# Altium PCB DB_3.PcbDoc
Units mil, origin at the board's own origin, x right, y up, seen from the top; angles counter-clockwise.
Board outline 1675 x 1950 mil, 4 copper layers (Top Layer, Signal Layer 1, Ground, Bottom Layer), stack 30.634 mil thick; 75 components, 70 nets, 262 pads, 0 vias.
Unrouted connection lines stored in the file: 137.
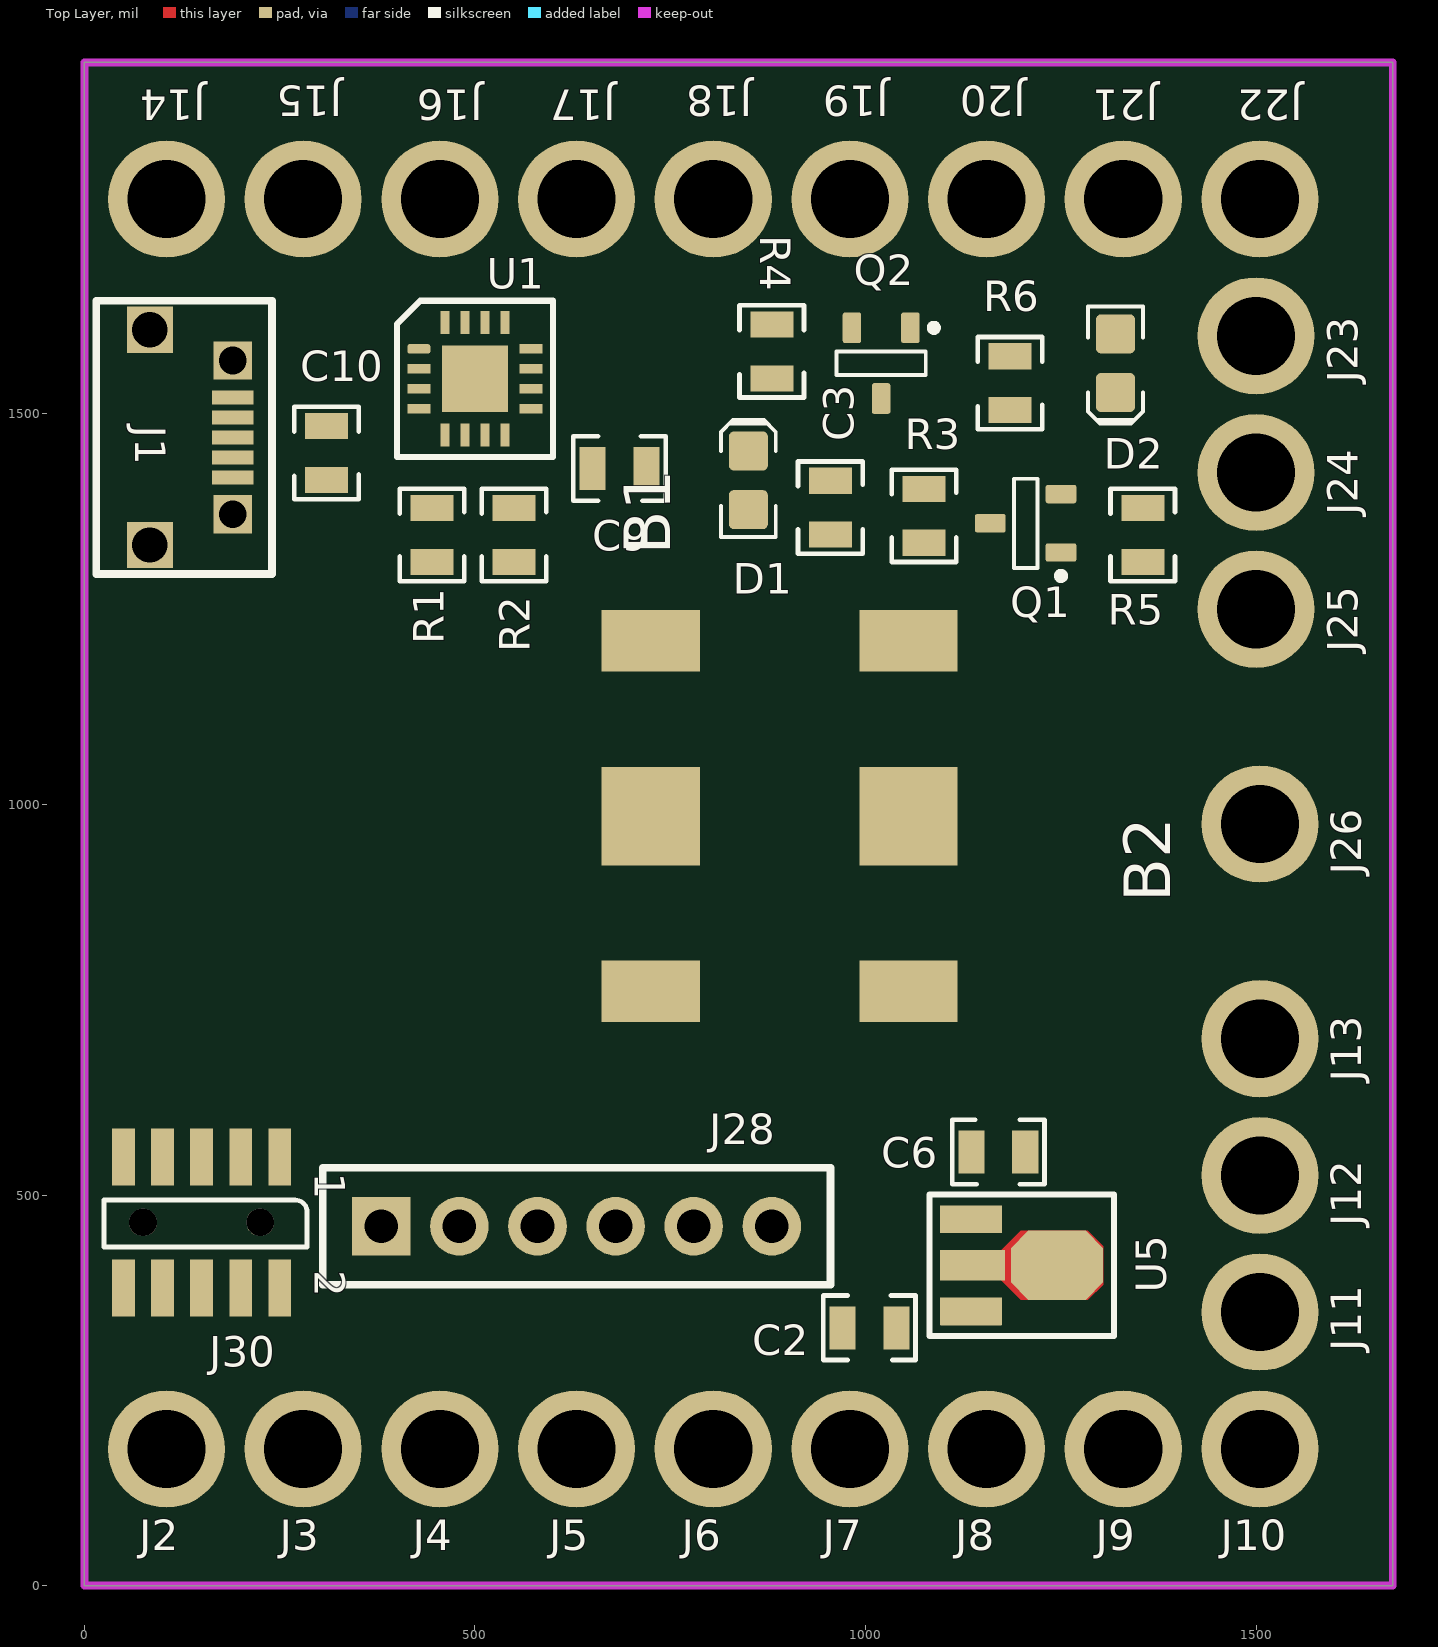
[diagram p0: Top Layer view]
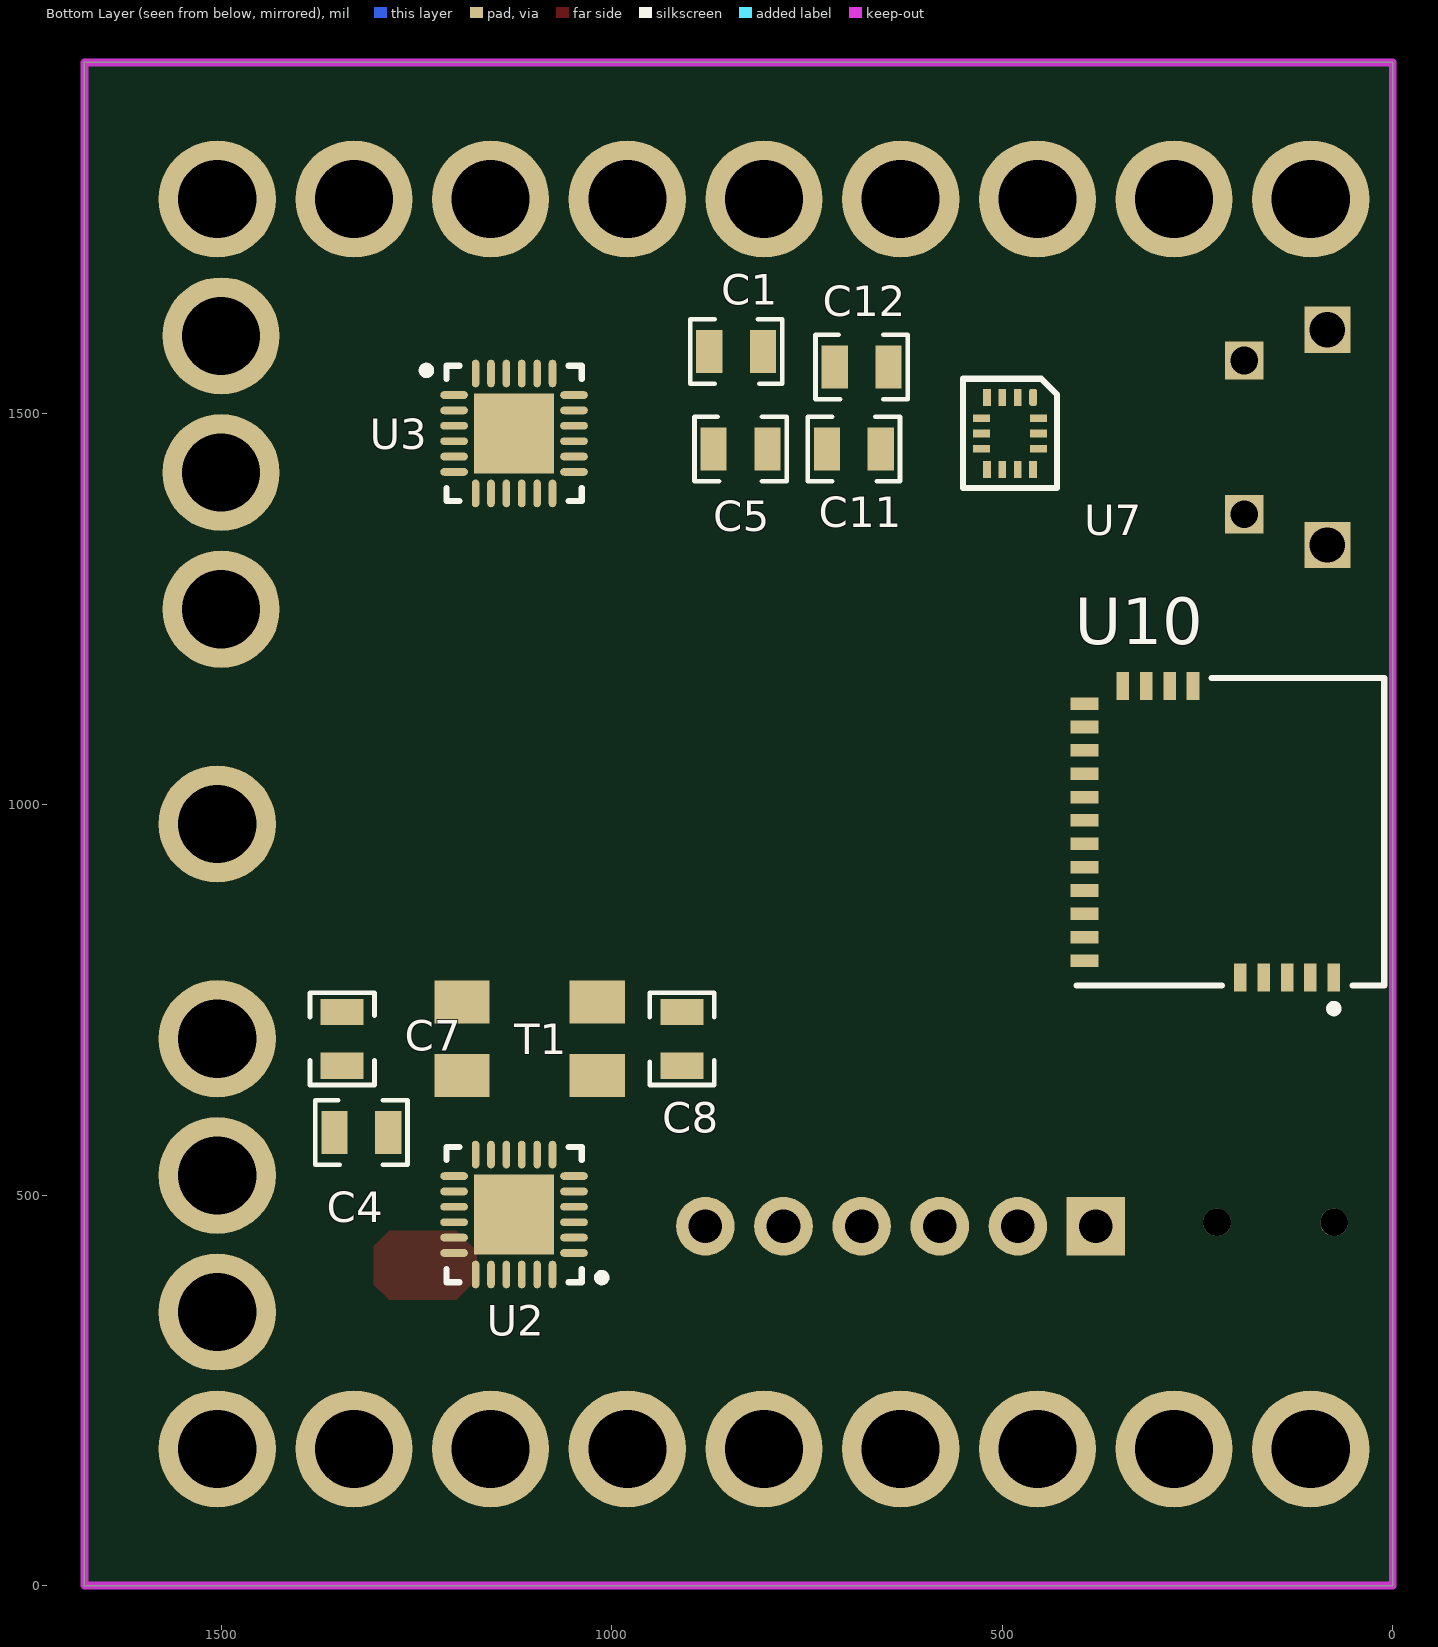
[diagram p1: Bottom Layer view, seen from below]
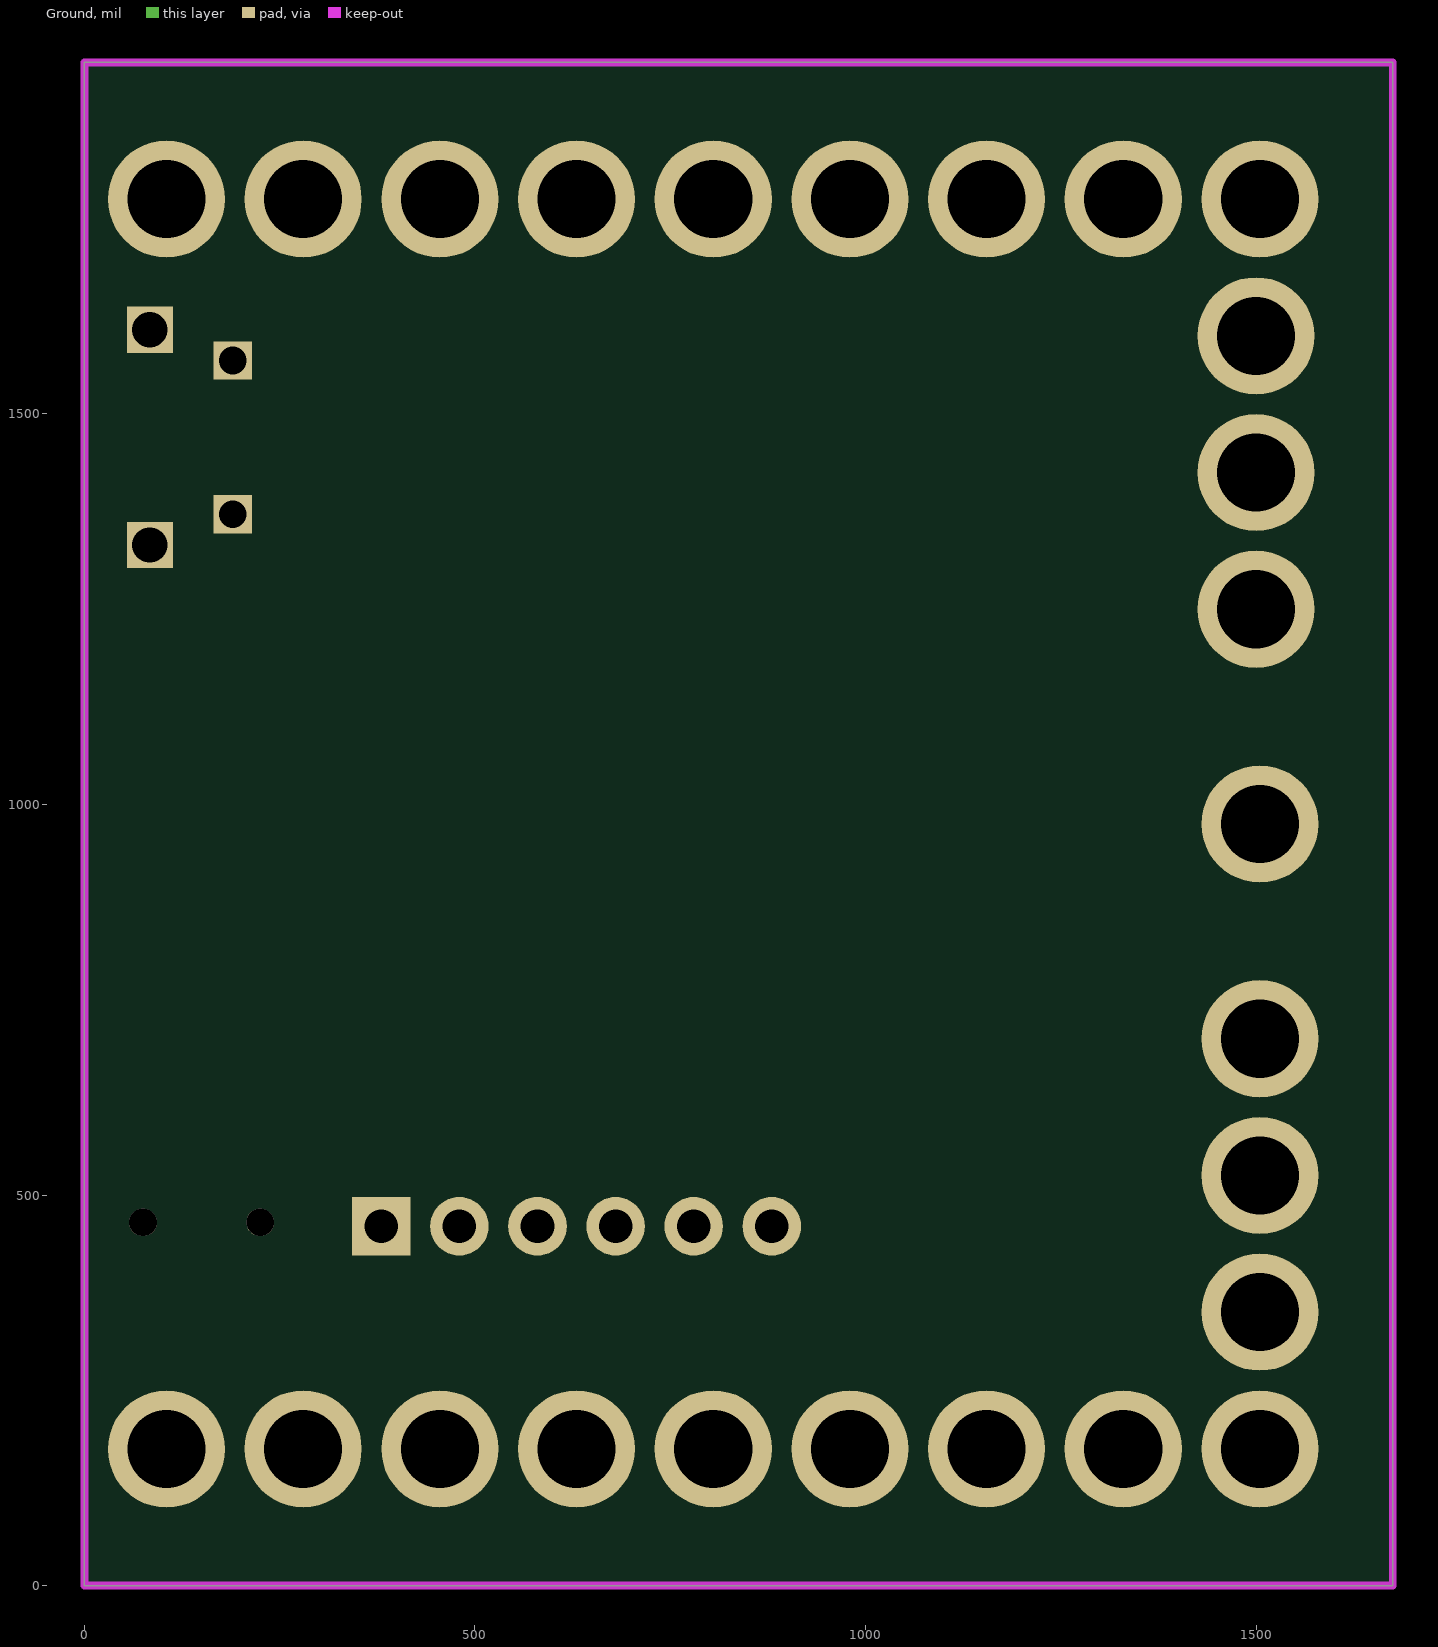
[diagram p2: Ground]

## Layer stack, top to bottom
Top Solder: solder mask 0.4, Solder Resist, Dk 3.5
Top Layer: signal copper 1.4
Dielectric 1: core 10, FR-4, Dk 4.2
Signal Layer 1: signal copper 1.417
Dielectric 3: prepreg 5, Dk 4.2
Ground: signal copper 1.417
Dielectric 2: core 10, Dk 4.2
Bottom Layer: signal copper 1.4
Bottom Solder: solder mask 0.4, Solder Resist, Dk 3.5

## Board outline
0,0 1675,0 1675,1950 0,1950

## Design rules (kind name [scope] priority, off if disabled: settings)
Clearance [All] p1: gap=6 ignorepadtopadclearanceinfootprint=FALSE except(0: Arc-Hole Track-Hole SMDPad-Hole THPad-Hole Via-Hole Fill-Hole Poly-Hole Region-Hole Text-Hole)
HoleSize [All] p1: absolutevalues=TRUE maxlimit=200 minlimit=1 maxpercent=80.000 minpercent=20.000
HoleToHoleClearance [All] p1: gap=6 allowstackedmicrovias=TRUE
MinimumSolderMaskSliver [All] p1: minsoldermaskwidth=6
PolygonConnect [All] p1: connectstyle=Relief reliefconductorwidth=10 reliefentries=4 polygonreliefangle="90 Angle" airgapwidth=10
RoutingVias [All] p1: holewidth=28 width=50 viastyle="Through Hole" minholewidth=8 minwidth=16 maxholewidth=28 maxwidth=50
SilkToSilkClearance [All] p1: silktosilkclearance=6
SilkToSolderMaskClearance [IsPad] p1: minsilkscreentomaskgap=6 clearancetoexposedcopper=TRUE
SolderMaskExpansion [All] p1: expansion=4
Width [All] p1: maxlimit=50 minlimit=6 preferedwidth=10
25 further rules are at their usual default settings.

## Classes and differential pairs
component class Sheet-3: C1 C3 C4 C5 C7 C8 C11 C12 D1 D2 J2 J3 J4 J5 J6 J7 J8 J9 J10 J11 J12 J13 J14 J15 J16 J17 J18 J19 J20 J21 J22 J23 J24 J25 J26 J28 J30 Q1 Q2 R3 R4 R5 R6 T1 U1 U2 U3 U7 U10
component class Battery_3: B1 B2 C2 C6 C9 C10 C16 C17 D3 H1 J1 R1 R2 R9 R10 R12 R13 R14 R15 R16 R17 R18 R19 U5 U8 U9

## Components (designator, comment, footprint, x,y, rotation, side; value= is the part's Value field where it differs from the comment)
B1 "XR48" XR48 1055,985 r270 top
B2 "XR48" XR48 725,985 r90 top
C1 "0.1µF" CAP-0805(2012)-R 840.55,1580 r180 bottom
C2 "0.33µF" CAP-0805(2012)-R 1005,330 r0 top
C3 "10000pF" CAP-0805(2012)-R 955,1380 r90 top
C4 "0.1µF" CAP-0805(2012)-R 1320.55,580 r0 bottom
C5 "10000pF" CAP-0805(2012)-R 835,1455 r0 bottom
C6 "0.1µF" CAP-0805(2012)-R 1170,555 r180 top
C7 "18pF" CAP-0805(2012)-R 1345,700 r90 bottom
C8 "18pF" CAP-0805(2012)-R 910,700 r270 bottom
C9 "47pF" CAP-0805(2012)-R 685,1430 r0 top
C10 "47pF" CAP-0805(2012)-R 310,1450 r270 top
C11 "0.1µF" CAP-0805(2012)-R 690,1455 r180 bottom
C12 "10000pF" CAP-0805(2012)-R 680,1560 r0 bottom
C16 "10uF" CAP-0805(2012)-R 2230,245 r0 top
C17 "4.7uF" CAP-0805(2012)-R 2010,245 r0 top
D1 "YELLOW" LED-0805-A 850,1415 r90 top
D2 "YELLOW" LED-0805-A 1320,1565 r270 top
D3 "Red" LED-0805-A 4255,245 r0 top
H1 "H-0805(2012)" H-0805(2012)-H 2450,245 r0 top
J1 "USB" USB_CONNECTOR_5P_MICRO_USB_FCI 190,1470 r270 top
J2 "Conductive Thread" THREAD_HOLE 105,174.61 r180 top
J3 "Conductive Thread" THREAD_HOLE 280,175 r180 top
J4 "Conductive Thread" THREAD_HOLE 455,175 r180 top
J5 "Conductive Thread" THREAD_HOLE 630,175 r180 top
J6 "Conductive Thread" THREAD_HOLE 805,175 r180 top
J7 "Conductive Thread" THREAD_HOLE 980,175 r180 top
J8 "Conductive Thread" THREAD_HOLE 1155,175 r180 top
J9 "Conductive Thread" THREAD_HOLE 1330,175 r180 top
J10 "Conductive Thread" THREAD_HOLE 1505,175 r180 top
J11 "Conductive Thread" THREAD_HOLE 1505,350 r180 top
J12 "Conductive Thread" THREAD_HOLE 1505,525 r180 top
J13 "Conductive Thread" THREAD_HOLE 1505,700 r270 top
J14 "Conductive Thread" THREAD_HOLE 105,1775 r0 top
J15 "Conductive Thread" THREAD_HOLE 280,1775 r180 top
J16 "Conductive Thread" THREAD_HOLE 455,1775 r0 top
J17 "Conductive Thread" THREAD_HOLE 630,1775 r180 top
J18 "Conductive Thread" THREAD_HOLE 805,1775 r180 top
J19 "Conductive Thread" THREAD_HOLE 980,1775 r180 top
J20 "Conductive Thread" THREAD_HOLE 1155,1775 r180 top
J21 "Conductive Thread" THREAD_HOLE 1330,1775 r180 top
J22 "Conductive Thread" THREAD_HOLE 1505,1775 r180 top
J23 "Conductive Thread" THREAD_HOLE 1500,1600 r90 top
J24 "Conductive Thread" THREAD_HOLE 1500,1425 r90 top
J25 "Conductive Thread" THREAD_HOLE 1500,1250 r90 top
J26 "Conductive Thread" THREAD_HOLE 1505,975 r180 top
J28 "Header 6 pin" HEADER-6-100MIL 380,460 r0 top
J30 "GRPB052VWQP-RC" GRPB052VWQP-RC 50,548.5 r270 top
Q1 "Value" SOT23-3 1205,1360 r0 top
Q2 "Value" SOT23-3 1020,1565 r90 top
R1 "27" R-0805(2012)-R 445,1345 r90 top
R2 "27" R-0805(2012)-R 550,1345 r90 top
R3 "30" R-0805(2012)-R 1075,1369.45 r90 top
R4 "30" R-0805(2012)-R 880,1580 r270 top
R5 "1k" R-0805(2012)-R 1355,1345 r90 top
R6 "1k" R-0805(2012)-R 1185,1539.45 r270 top
R9 "976KR" R-0805(2012)-R 2625,245 r0 top
R10 "562KR" R-0805(2012)-R 1790,245 r0 top
R12 "Resistance" R-0805(2012)-R 3210,245 r0 top
R13 "560k" R-0805(2012)-R 4670,245 r0 top
R14 "Resistance" R-0805(2012)-R 4890,245 r0 top
R15 "560k" R-0805(2012)-R 3430,245 r0 top
R16 "Resistance" R-0805(2012)-R 2990,245 r0 top
R17 "Resistance" R-0805(2012)-R 3650,245 r0 top
R18 "Resistance" R-0805(2012)-R 5110,245 r0 top
R19 "Resistance" R-0805(2012)-R 4450,245 r0 top
T1 "8MHz" CRYSTAL-8MHZ 1105,700 r180 bottom
U1 "FT230XQ-R" QFN-16 500,1545 r0 top
U2 "ADI-AD7147" LFCSP_WQ 1125,475 r0 bottom
U3 "ADI-AD7147" LFCSP_WQ 1125,1475 r180 bottom
U5 "L78L33ACUTR" SOT89-3 1200,410 r0 top
U7 "LSM6DS3H" LGA-14 490,1475 r270 bottom
U8 "MCP1640BT-I/CHY" MCHP-SOT-23-CHY6_L 2805,205 r0 top
U9 "BQ2002DSN" D0008A_M 3940,170 r0 top
U10 "CYBLE-022001-00" CYP-SP21_V 235,965 r270 bottom

## Footprints (in the part's own frame and the unit in brackets; to place one, negate y for a bottom-side part, rotate by r counter-clockwise, add the part's x,y. Pads: shape width x height; smd on the part's side, far side on the other; paste and mask are expansions set on the pad)
CAP-0805(2012)-R [mm] "Capacitor 0805(2012) Reflow"
  rect 0.85x1.4 smd: 1(-0.875,0) 2(0.875,0)
  silkscreen extent -1.5,-1.05 1.5,1.05, body extent -1,-0.63 1,0.63, height 0.78
CRYSTAL-8MHZ [mm] "ABRACON ABMM2-8.000MHZ-E2-T"
  rect 1.8x1.4 smd: 1(-2.2,-1.2) 2(-2.2,1.2) 2(2.2,-1.2) 3(2.2,1.2)
  body extent -3,-1.78 3,1.82, height 1.21
CYP-SP21_V [mm] "Module, 2-Leads, Body 10x10mm"
  rect 0.91x0.41 smd: 1(4.745,4.053) 2(4.745,3.293) 3(4.745,2.533) 4(4.745,1.773) 5(4.745,1.013) 18(-4.745,-2.808) 19(-4.745,-2.047) 20(-4.745,-1.288) 21(-4.745,-0.527)
  rect 0.41x0.91 smd: 6(4.19,-4.052) 7(3.43,-4.052) 8(2.67,-4.052) 9(1.91,-4.052) 10(1.15,-4.052) 11(0.39,-4.052) 12(-0.37,-4.052) 13(-1.13,-4.052) 14(-1.89,-4.052) 15(-2.65,-4.052) 16(-3.41,-4.052) 17(-4.17,-4.052)
  silkscreen extent -5,-4.31 5.87,5.69, body extent -5,-4.31 5,5.69, height 1.8
D0008A_M [mm] "SOIC, 8-Leads, Body 5x4mm, Pitch 1.27mm, IPC Low Density"
  rrect15% 1.65x0.65 smd: 1(-2.825,1.905) 2(-2.825,0.635) 3(-2.825,-0.635) 4(-2.825,-1.905) 5(2.825,-1.905) 6(2.825,-0.635) 7(2.825,0.635) 8(2.825,1.905)
  silkscreen extent -2.95,-2.5 1.6,2.9, body extent -3,-2.45 3,2.45, height 1.63
GRPB052VWQP-RC [mm] "CONN HEADER .050\" 10PS DL SMD AU"
  rect 1.85x0.74 smd: 1(0,5.08) 2(4.25,5.08) 3(0,3.81) 4(4.25,3.81) 5(0,2.54) 6(4.25,2.54) 7(0,1.27) 8(4.25,1.27) 9(0,0) 10(4.25,0)
  round 0.9 hole 0.9 unplated: 21(2.121,0.635) 22(2.121,4.445)
  silkscreen extent 1.4,-0.63 2.92,5.97, body extent -0.62,-0.63 4.88,5.72, height 4.1
H-0805(2012)-H [mm] "Inductor 0805(2012) Reflow"
  rect 0.85x1.4 smd: 1(-0.875,0) 2(0.875,0)
  silkscreen extent -1.5,-1.05 1.5,1.05, body extent -1,-0.62 1,0.63, height 0.5
HEADER-6-100MIL [mil] "100 mil spacing"
  rect 75x75 hole 43: 1(0,0)
  round 75 hole 43: 2(100,0) 3(200,0) 4(300,0) 5(400,0) 6(500,0)
  silkscreen extent -75,-75 575,75, body extent -50,-50 550,50, height 339
LED-0805-A [mil]
  round 20 on Mech14: 0(0,0)
  rrect25% 50x50 smd: A(-37.5,0) K(37.5,0)
  Top Layer pour cut-out: -15,30 15,30 15,-30 -15,-30
  silkscreen extent -72,-35 77,35, body extent -39,-25 39,25, height 31
LFCSP_WQ [mm] "QFN, 24-Leads, Body 4x4mm, Pitch 0.5mm, Thermal Pad 2.5x2.5mm, IPC Medium Density"
  oval 0.9x0.25 smd: 1(-1.95,1.25) 2(-1.95,0.75) 3(-1.95,0.25) 4(-1.95,-0.25) 5(-1.95,-0.75) 6(-1.95,-1.25) 13(1.95,-1.25) 14(1.95,-0.75) 15(1.95,-0.25) 16(1.95,0.25) 17(1.95,0.75) 18(1.95,1.25)
  oval 0.25x0.9 smd: 7(-1.25,-1.95) 8(-0.75,-1.95) 9(-0.25,-1.95) 10(0.25,-1.95) 11(0.75,-1.95) 12(1.25,-1.95) 19(1.25,1.95) 20(0.75,1.95) 21(0.25,1.95) 22(-0.25,1.95) 23(-0.75,1.95) 24(-1.25,1.95)
  rect 2.6x2.6 smd: 25(0,0)
  silkscreen extent -2.97,-2.2 2.2,2.2, body extent -2.05,-2.05 2.05,2.05, height 1
LGA-14 [mm] "LGA-14 2.5X3X0.86 14L"
  rrect50% 0.55x0.25 smd: 1(-1.175,0.75)
  rect 0.55x0.25 smd: 2(-1.175,0.25) 3(-1.175,-0.25) 4(-1.175,-0.75) 8(1.175,-0.75) 9(1.175,-0.25) 10(1.175,0.25) 11(1.175,0.75)
  rect 0.25x0.55 smd: 5(-0.5,-0.925) 6(0,-0.925) 7(0.5,-0.925) 12(0.5,0.925) 13(0,0.925) 14(-0.5,0.925)
  silkscreen extent -1.78,-1.52 1.78,1.52, body extent -1.52,-1.27 1.48,1.23, height 0.86
MCHP-SOT-23-CHY6_L [mm] "SOT23, 6-Leads, Body 2.9x1.55mm, Pitch 0.95mm, IPC High Density"
  rect 0.9x0.6 smd: 1(-1.2,0.95) 2(-1.2,0) 3(-1.2,-0.95) 4(1.2,-0.95) 5(1.2,0) 6(1.2,0.95)
  silkscreen extent -1.32,-1.55 0.35,1.92, body extent -0.9,-1.55 0.9,1.55, height 1.45
QFN-16 [mm]
  rrect50% 0.75x0.3 smd: 1(-1.825,0.975)
  rect 0.75x0.3 smd: 2(-1.825,0.325) 3(-1.825,-0.325) 4(-1.825,-0.975) 9(1.825,-0.975) 10(1.825,-0.325) 11(1.825,0.325) 12(1.825,0.975)
  rect 0.3x0.75 smd: 5(-0.975,-1.825) 6(-0.325,-1.825) 7(0.325,-1.825) 8(0.975,-1.825) 13(0.975,1.825) 14(0.325,1.825) 15(-0.325,1.825) 16(-0.975,1.825)
  rect 2.15x2.15 smd: 17(0,0)
  silkscreen extent -2.54,-2.54 2.54,2.54, body extent -2,-2 2,2, height 0.92
R-0805(2012)-R [mm] "Resistor 0805(2012) Reflow"
  rect 0.85x1.4 smd: 1(-0.875,0) 2(0.875,0)
  silkscreen extent -1.5,-1.05 1.5,1.05, body extent -1,-0.62 1,0.63, height 0.5
SOT23-3 [mm] "SOT23, 3 pin"
  round 0.5 on Mech14: 0(0,0)
  rrect25% 1x0.6 smd: 1(1.15,-0.95) 2(-1.15,0) 3(1.15,0.95)
  silkscreen extent -0.38,-1.81 1.25,1.45, body extent -1.4,-1.45 1.4,1.45, height 1.29
SOT89-3 [mm] "JEDEC TO-243 option AA / SOT89"
  round 1 on Mech14: 0(0,0)
  rrect1% 2x0.9 smd: 1(-1.65,1.5) 3(-1.65,-1.5)
  rrect1% 2.1x1 smd: 2(-1.6,0)
  oct 3x2.25 smd: 2(1.15,0)
  Top Layer region: -0.7,-0.45 -0.025,-1.125 2.15,-1.125 2.65,-0.625 2.65,0.625 2.15,1.125 -0.025,1.125 -0.7,0.45
  silkscreen extent -3,-2.3 3,2.3, body extent -2.25,-2.35 2.2,2.35, height 1.69
THREAD_HOLE [mil] "MAGNETIC_THREAD_HOLE"
  round 150 hole 100: 1(0,0)
USB_CONNECTOR_5P_MICRO_USB_FCI [mm] "USB_Connector_5P_MICRO_USB_FCI_TypeB"
  rect 0.45x1.35 smd: 1(-1.3,0) 2(-0.65,0) 3(0,0) 4(0.65,0) 5(1.3,0)
  rect 1.25x1.25 hole 0.9: 15(2.5,0) 16(-2.5,0)
  rect 1.5x1.5 hole 1.15: 18(-3.5,-2.7) 18(3.5,-2.7)
  silkscreen extent -4.44,-4.45 4.45,1.27, body extent -4.02,-5.33 4.02,0.25, height 2.73
XR48 [mm] "Size 13 Coin Cell Battery"
  rect 3.2x3.2 smd: 1(0,0)
  rect 2x3.2 smd: 2(-5.7,0) 2(5.7,0)
  body extent -6.68,-3.95 6.68,4.19, height 5.75

## Part data
C1 C4 C6 C11: library part C-0805(2012), "___ OHM ___ mW 0805(2012) SMD", Manufacturer=Yageo, Manufacturer Part Number=CC0805KRX7R9BB104, Operating Temperature="-55°C ~ 125°C", Package / Case="0805 (2012 Metric)", Ratings=-, Supplier Part Number 1=311-1140-1-ND, Temperature Coefficient=X7R, Tolerance=±10%, Voltage - Rated=50V, Applications="General Purpose", Capacitance=0.1µF, Category=Capacitors, Failure Rate=-, Features=-, Height - Seated (Max)=-, Lead Spacing=-, Lead Style=-, Mounting Type="Surface Mount, MLCC", Packaging="Cut Tape (CT)", Part Status=Active, RoHS="RoHS Compliant", Size / Dimension="0.079\" L x 0.049\" W (2.00mm x 1.25mm)", Supplier 1=Digi-Key, Thickness (Max)="0.033\" (0.85mm)"
  C1 C4: ComponentLink1Description=http://www.yageo.com/documents/recent/UPY-GPHC_X7R_6.3V-to-50V_16.pdf, ComponentLink1URL=http://www.yageo.com/documents/recent/UPY-GPHC_X7R_6.3V-to-50V_16.pdf, Pricing 1="1=0.1, 10=0.052, 25=0.0376, 50=0.0282, 100=0.023, 250=0.01928, 500=0.01646, 1000=0.01294 (USD)", Stock 1=1673347
  C6: ComponentLink1Description=http://www.yageo.com/documents/recent/UPY-GPHC_X7R_6.3V-to-50V_16.pdf, ComponentLink1URL=http://www.yageo.com/documents/recent/UPY-GPHC_X7R_6.3V-to-50V_16.pdf, Pricing 1="1=0.1, 10=0.052, 25=0.0376, 50=0.0282, 100=0.023, 250=0.01928, 500=0.01646, 1000=0.01294 (USD)", Stock 1=1673292
  C11: ComponentLink1Description=http://www.yageo.com/documents/recent/UPY-GPHC_X7R_6.3V-to-50V_17.pdf, ComponentLink1URL=http://www.yageo.com/documents/recent/UPY-GPHC_X7R_6.3V-to-50V_17.pdf, Pricing 1="1=0.1, 10=0.053, 25=0.0388, 50=0.029, 100=0.0237, 250=0.0198, 500=0.0169, 1000=0.01328 (USD)", Stock 1=1402266
C2: library part C-0805(2012), "___ OHM ___ mW 0805(2012) SMD", Manufacturer=Yageo, Manufacturer Part Number=CC0805KKX7R7BB334, Operating Temperature="-55°C ~ 125°C", Package / Case="0805 (2012 Metric)", Ratings=-, Supplier Part Number 1=311-1882-1-ND, Temperature Coefficient=X7R, Tolerance=±10%, Voltage - Rated=16V, Applications="General Purpose", Capacitance=0.33µF, Category=Capacitors, ComponentLink1Description=http://www.yageo.com/documents/recent/UPY-GPHC_X7R_6.3V-to-50V_16.pdf, ComponentLink1URL=http://www.yageo.com/documents/recent/UPY-GPHC_X7R_6.3V-to-50V_16.pdf, Failure Rate=-, Features=-, Height - Seated (Max)=-, Lead Spacing=-, Lead Style=-, Mounting Type="Surface Mount, MLCC", Packaging="Cut Tape (CT)", Part Status=Active, Pricing 1="1=0.19, 10=0.129, 25=0.0948, 50=0.0776, 100=0.0655, 250=0.05344, 500=0.04482, 1000=0.03965 (USD)", RoHS="RoHS Compliant", Size / Dimension="0.079\" L x 0.049\" W (2.00mm x 1.25mm)", Stock 1=5738, Supplier 1=Digi-Key, Thickness (Max)="0.057\" (1.45mm)"
C3 C5 C12: library part C-0805(2012), "___ OHM ___ mW 0805(2012) SMD", Manufacturer=Yageo, Manufacturer Part Number=CC0805KRX7R9BB103, Operating Temperature="-55°C ~ 125°C", Package / Case="0805 (2012 Metric)", Ratings=-, Supplier Part Number 1=311-1136-1-ND, Temperature Coefficient=X7R, Tolerance=±10%, Voltage - Rated=50V, Applications="General Purpose", Capacitance=10000pF, Category=Capacitors, Failure Rate=-, Features=-, Height - Seated (Max)=-, Lead Spacing=-, Lead Style=-, Mounting Type="Surface Mount, MLCC", Packaging="Cut Tape (CT)", Part Status=Active, RoHS="RoHS Compliant", Size / Dimension="0.079\" L x 0.049\" W (2.00mm x 1.25mm)", Supplier 1=Digi-Key, Thickness (Max)="0.024\" (0.60mm)"
  C3 C5: ComponentLink1Description=http://www.yageo.com/documents/recent/UPY-GPHC_X7R_6.3V-to-50V_16.pdf, ComponentLink1URL=http://www.yageo.com/documents/recent/UPY-GPHC_X7R_6.3V-to-50V_16.pdf, Pricing 1="1=0.1, 10=0.032, 25=0.0232, 50=0.0174, 100=0.0141, 250=0.01184, 500=0.0101, 1000=0.00794 (USD)", Stock 1=786089
  C12: ComponentLink1Description=http://www.yageo.com/documents/recent/UPY-GPHC_X7R_6.3V-to-50V_17.pdf, ComponentLink1URL=http://www.yageo.com/documents/recent/UPY-GPHC_X7R_6.3V-to-50V_17.pdf, Pricing 1="1=0.1, 10=0.033, 25=0.0236, 50=0.0178, 100=0.0145, 250=0.01216, 500=0.01036, 1000=0.00814 (USD)", Stock 1=501331
C7 C8: library part C-0805(2012), "___ OHM ___ mW 0805(2012) SMD", Manufacturer=Yageo, Manufacturer Part Number=CC0805JRNPO9BN180, Operating Temperature="-55°C ~ 125°C", Package / Case="0805 (2012 Metric)", Ratings=-, Supplier Part Number 1=311-1102-1-ND, Temperature Coefficient="C0G, NP0", Tolerance=±5%, Voltage - Rated=50V, Applications="General Purpose", Capacitance=18pF, Category=Capacitors, ComponentLink1Description=http://www.yageo.com/NewPortal/yageodocoutput?fileName=/pdf/MLCC/UPY-GP_NP0_16V-to-50V_14.pdf, ComponentLink1URL=http://www.yageo.com/NewPortal/yageodocoutput?fileName=/pdf/MLCC/UPY-GP_NP0_16V-to-50V_14.pdf, Failure Rate=-, Features=-, Height - Seated (Max)=-, Lead Spacing=-, Lead Style=-, Mounting Type="Surface Mount, MLCC", Packaging="Cut Tape (CT)", Part Status=Active, Pricing 1="1=0.1, 10=0.055, 25=0.0396, 50=0.0298, 100=0.0243, 250=0.02032, 500=0.01734, 1000=0.01363 (USD)", RoHS="RoHS Compliant", Size / Dimension="0.079\" L x 0.049\" W (2.00mm x 1.25mm)", Stock 1=101710, Supplier 1=Digi-Key, Thickness (Max)="0.024\" (0.60mm)"
C9 C10: library part C-0805(2012), "___ OHM ___ mW 0805(2012) SMD", Manufacturer=Yageo, Manufacturer Part Number=CC0805JRNPO9BN470, Operating Temperature="-55°C ~ 125°C", Package / Case="0805 (2012 Metric)", Ratings=-, Supplier Part Number 1=311-1107-1-ND, Temperature Coefficient="C0G, NP0", Tolerance=±5%, Voltage - Rated=50V, Applications="General Purpose", Capacitance=47pF, Category=Capacitors, ComponentLink1Description=http://www.yageo.com/NewPortal/yageodocoutput?fileName=/pdf/MLCC/UPY-GP_NP0_16V-to-50V_14.pdf, ComponentLink1URL=http://www.yageo.com/NewPortal/yageodocoutput?fileName=/pdf/MLCC/UPY-GP_NP0_16V-to-50V_14.pdf, Failure Rate=-, Features=-, Height - Seated (Max)=-, Lead Spacing=-, Lead Style=-, Mounting Type="Surface Mount, MLCC", Packaging="Cut Tape (CT)", Part Status=Active, Pricing 1="1=0.1, 10=0.055, 25=0.0396, 50=0.0298, 100=0.0243, 250=0.02032, 500=0.01734, 1000=0.01363 (USD)", RoHS="RoHS Compliant", Size / Dimension="0.079\" L x 0.049\" W (2.00mm x 1.25mm)", Stock 1=181638, Supplier 1=Digi-Key, Thickness (Max)="0.024\" (0.60mm)"
C16: library part C-0805(2012), "___ OHM ___ mW 0805(2012) SMD", Case/Package=0805, Case Code (Metric)=2012, Dielectric=X5R, Manufacturer=Murata, Manufacturer Part Number=GRM219R61A106KE44D, Max Operating Temperature=85°C, Min Operating Temperature=-55°C, Package Quantity=1, Supplier Part Number 1=81-GRM219R61A106KE4D, Tolerance=10%, Voltage=10V, Capacitance=10uF, Case Code (Imperial)=0805, ComponentLink1Description=https://datasheet.ciiva.com/172/grm219r61a106ke44-01-172352.pdf, ComponentLink1URL=https://datasheet.ciiva.com/172/grm219r61a106ke44-01-172352.pdf, ComponentLink2Description=https://datasheet.ciiva.com/172/grm219r61a106ke44-01-172353.pdf, ComponentLink2URL=https://datasheet.ciiva.com/172/grm219r61a106ke44-01-172353.pdf, ComponentLink3Description=https://datasheet.ciiva.com/172/grm219r61a106ke44-01-172354.pdf, ComponentLink3URL=https://datasheet.ciiva.com/172/grm219r61a106ke44-01-172354.pdf, ComponentLink4Description=https://datasheet.ciiva.com/5414/product-5414357.pdf, ComponentLink4URL=https://datasheet.ciiva.com/5414/product-5414357.pdf, ComponentLink5Description=https://datasheet.ciiva.com/3777/54grm219r61a106ke4423-3777910.pdf, ComponentLink5URL=https://datasheet.ciiva.com/3777/54grm219r61a106ke4423-3777910.pdf, ComponentLink6Description=https://datasheet.ciiva.com/7719/c02e-7719062.pdf, ComponentLink6URL=https://datasheet.ciiva.com/7719/c02e-7719062.pdf, ComponentLink7Description=https://datasheet.ciiva.com/2989/product-2989663.pdf, ComponentLink7URL=https://datasheet.ciiva.com/2989/product-2989663.pdf, ComponentLink8Description=https://datasheet.ciiva.com/17451/product-17451791.pdf, ComponentLink8URL=https://datasheet.ciiva.com/17451/product-17451791.pdf, Depth=1.25mm, Height=0.85mm, Lead Free="Lead Free", Length=2mm, Material=Ceramic, Mount="Surface Mount", Packaging="Tape and Reel", Pricing 1="1=0.2, 10=0.084, 50=0.084, 100=0.057, 1000=0.043, 10000=0.03 (USD)", Radiation Hardening=No, REACH SVHC="No SVHC", Stock 1=105901, Supplier 1=Mouser, Termination=SMD/SMT, Thickness=0.037inch, Voltage Rating=10V, Voltage Rating (DC)=10V, Width=1.25mm
C17: library part C-0805(2012), "___ OHM ___ mW 0805(2012) SMD", Case/Package=0805, Case Code (Metric)=2012, Dielectric=X5R, Manufacturer=Murata, Manufacturer Part Number=GRM21BR61C475KA88L, Max Operating Temperature=85°C, Min Operating Temperature=-55°C, Package Quantity=1, Supplier Part Number 1=81-GRM21BR61C475KA8L, Tolerance=10%, Voltage=16V, Capacitance=4.7uF, Case Code (Imperial)=0805, ComponentLink1Description=https://datasheet.ciiva.com/2989/product-2989699.pdf, ComponentLink1URL=https://datasheet.ciiva.com/2989/product-2989699.pdf, ComponentLink2Description=https://datasheet.ciiva.com/2989/product-2989700.pdf, ComponentLink2URL=https://datasheet.ciiva.com/2989/product-2989700.pdf, ComponentLink3Description=https://datasheet.ciiva.com/16199/product-16199957.pdf, ComponentLink3URL=https://datasheet.ciiva.com/16199/product-16199957.pdf, ComponentLink4Description=https://datasheet.ciiva.com/16624/product-16624469.pdf, ComponentLink4URL=https://datasheet.ciiva.com/16624/product-16624469.pdf, ComponentLink5Description=https://datasheet.ciiva.com/22706/608985-22706821.pdf, ComponentLink5URL=https://datasheet.ciiva.com/22706/608985-22706821.pdf, ComponentLink6Description=https://datasheet.ciiva.com/3777/grm21br61c475ka8823-3777176.pdf, ComponentLink6URL=https://datasheet.ciiva.com/3777/grm21br61c475ka8823-3777176.pdf, ComponentLink7Description=https://datasheet.ciiva.com/137/product-137674.pdf, ComponentLink7URL=https://datasheet.ciiva.com/137/product-137674.pdf, ComponentLink8Description=https://datasheet.ciiva.com/137/product-137675.pdf, ComponentLink8URL=https://datasheet.ciiva.com/137/product-137675.pdf, ComponentLink9Description=https://datasheet.ciiva.com/137/product-137676.pdf, ComponentLink9URL=https://datasheet.ciiva.com/137/product-137676.pdf, Depth=1.25mm, Height=1.25mm, Lead Free="Lead Free", Length=2mm, Mount="Surface Mount", Packaging="Tape and Reel", Pricing 1="1=0.2, 10=0.076, 50=0.076, 100=0.053, 1000=0.037, 10000=0.027 (USD)", Radiation Hardening=No, REACH SVHC="No SVHC", Stock 1=95997, Supplier 1=Mouser, Termination=SMD/SMT, Thickness=0.053inch, Voltage Rating=16V, Voltage Rating (DC)=16V, Width=1.25mm
D1 D2: library part LED_0805_YELLOW, "LED, 0805 SMD, YELLOW", Color=Yellow, Current - Test=20mA, Lens Color=White, Manufacturer="OSRAM Opto Semiconductors Inc.", Manufacturer Part Number="LY R976-PS-36", Millicandela Rating=162.5mcd, Package / Case="0805 (2012 Metric)", Supplier Device Package=0805, Supplier Part Number 1=475-2560-1-ND, Voltage - Forward (Vf) (Typ)=2V, Category=Optoelectronics, ComponentLink1Description=http://www.osram-os.com/Graphics/XPic9/00078941_0.pdf, ComponentLink1URL=http://www.osram-os.com/Graphics/XPic9/00078941_0.pdf, Features=-, Height (Max)=0.90mm, Lens Style/Size="Rectangle with Flat Top, 1.30mm x 1.25mm", Lens Transparency=Diffused, Mounting Type="Surface Mount", Packaging="Cut Tape (CT)", Part Status=Active, Pricing 1="1=0.26, 10=0.19, 25=0.1396, 100=0.0998, 250=0.06788, 500=0.0599, 1000=0.04692 (USD)", RoHS="RoHS Compliant", Size / Dimension="2.00mm L x 1.25mm W", Stock 1=77170, Supplier 1=Digi-Key, Viewing Angle=160°, Wavelength - Dominant=588nm, Wavelength - Peak=591nm
D3: library part LED_0805_RED, "LED, 0805 SMD, Red", Current - Test=20mA, Lens Color=White, Manufacturer="OSRAM Opto Semiconductors Inc.", Manufacturer Part Number="LS R976-NR-1", Millicandela Rating=104mcd, Package / Case="0805 (2012 Metric)", Supplier Part Number 1=475-1278-1-ND, Voltage - Forward (Vf) (Typ)=2V, Category=Optoelectronics, Color=Red, ComponentLink1Description=http://www.osram-os.com/Graphics/XPic8/00078896_0.pdf, ComponentLink1URL=http://www.osram-os.com/Graphics/XPic8/00078896_0.pdf, Features=-, Height (Max)=0.90mm, Lens Style/Size="Rectangle with Flat Top, 1.30mm x 1.25mm", Lens Transparency=Diffused, Mounting Type="Surface Mount", Packaging="Cut Tape (CT)", Part Status=Active, Pricing 1="1=0.26, 10=0.19, 25=0.1396, 100=0.0998, 250=0.06788, 500=0.0599, 1000=0.04692 (USD)", RoHS="RoHS Compliant", Size / Dimension="2.00mm L x 1.25mm W", Stock 1=162363, Supplier 1=Digi-Key, Viewing Angle=160°, Wavelength - Dominant=633nm, Wavelength - Peak=645nm
H1: Case/Package=0805, Case Code (Metric)=2012, Current Rating=700mA, DC Resistance (DCR)=260mR, Inductance=4.7uh, Manufacturer=TDK, Manufacturer Part Number=MLP2012S4R7MT0S1, Max Operating Temperature=125°C, Min Operating Temperature=-40°C, Package Quantity=4000, Supplier Part Number 1=810-MLP2012S4R7MT0S1, Test Frequency=2MHz, Tolerance=20%, Case Code (Imperial)=0805, ComponentLink1Description=https://datasheet.ciiva.com/41798/inductor-commercial-power-mlp-en-41798601.pdf, ComponentLink1URL=https://datasheet.ciiva.com/41798/inductor-commercial-power-mlp-en-41798601.pdf, Core Material=Ferrite, Height - Seated (Max)=0.039inch, Length=0.079inch, Packaging="Tape and Reel", Pricing 1="1=0.36, 10=0.254, 50=0.254, 100=0.236, 1000=0.167, 10000=0.112 (USD)", Shielding=Shielded, Stock 1=5251, Supplier 1=Mouser, Width=0.049inch
J1: "USB_Connector_5P_MICRO_USB_FCI", Current Rating="1.8A per Contact", Insulation Color=Black, Manufacturer="Amphenol FCI", Manufacturer Part Number=10118194-0001LF, Material Flammability Rating="UL94 V-0", Operating Temperature="-30°C ~ 80°C", Supplier Part Number 1=609-4618-1-ND, Voltage - Rated=100VAC, Category="Connectors, Interconnects", ComponentLink1Description=http://portal.fciconnect.com/Comergent//fci/drawing/10118194.pdf, ComponentLink1URL=http://portal.fciconnect.com/Comergent//fci/drawing/10118194.pdf, Connector Type="USB - micro B", Contact Finish=Gold, Features="Solder Retention", Gender=Receptacle, Ingress Protection=-, Mating Cycles=10000, Mounting Feature=Horizontal, Mounting Type="Surface Mount, Right Angle; Through Hole", Number of Contacts=5, Number of Ports=1, Packaging="Cut Tape (CT)", Part Status=Active, Pricing 1="1=0.46, 10=0.437, 25=0.3744, 50=0.318, 100=0.3056, 250=0.27444, 500=0.26196 (USD)", RoHS="RoHS Compliant", Shell/Shielding Material="Steel, Stainless", Shielding=Shielded, Specifications="USB 2.0", Stock 1=267893, Supplier 1=Digi-Key, Termination=Solder
J2 J3 J4 J5 J6 J7 J8 J9 J10 J11 J12 J13 J14 J15 J16 J17 J18 J19 J20 J21 J22 J23 J24 J25 J26: library part CON-1_Pin_Thread, "Header, 1 pin, Conductive Thread"
J28: library part CON-6Pin-100Mil, "Header, 6 pin, .1 pitch", Current Rating=-, Insulation Color=Black, Manufacturer="Amphenol FCI", Manufacturer Part Number=68000-406HLF, Material Flammability Rating="UL94 V-0", Supplier Part Number 1=609-3263-ND, Applications=-, Category="Connectors, Interconnects", ComponentLink1Description=http://portal.fciconnect.com/Comergent//fci/drawing/68000.pdf, ComponentLink1URL=http://portal.fciconnect.com/Comergent//fci/drawing/68000.pdf, Connector Type=Header, Contact Finish - Mating=Tin, Contact Finish - Post=Tin, Contact Finish Thickness - Mating="100µin (2.54µm)", Contact Finish Thickness - Post=-, Contact Length - Mating="0.230\" (5.84mm)", Contact Length - Post="0.095\" (2.41mm)", Contact Material="Phosphor Bronze", Contact Shape=Square, Contact Type="Male Pin", Fastening Type=-, Features=-, Ingress Protection=-, Insulation Height="0.100\" (2.54mm)", Insulation Material=-, Mated Stacking Heights=-, Mounting Type="Through Hole", Number of Positions=6, Number of Positions Loaded=All, Number of Rows=1, Operating Temperature=-, Overall Contact Length="0.425\" (10.80mm)", Packaging=Bulk, Part Status=Active, Pitch - Mating="0.100\" (2.54mm)", Pricing 1="1=0.25, 10=0.233, 100=0.1615, 500=0.13662, 1000=0.11178, 5000=0.09936, 10000=0.09005 (USD)", RoHS="RoHS Compliant", Row Spacing - Mating=-, Shrouding=Unshrouded, Stock 1=11680, Style="Board to Board", Supplier 1=Digi-Key, Termination=Solder, Voltage Rating=-
J30: "CONN HEADER .050\" 10PS DL SMD AU", Color=-, Manufacturer="Sullins Connector Solutions", Supplier Part Number 1=S9013E-05-ND, Category="Connectors, Interconnects", ComponentLink1Description=http://www.sullinscorp.com/catalogs/85_PAGE90-91_.050_MALE_HDR_ST_RA_SMT.pdf, ComponentLink1URL=http://www.sullinscorp.com/catalogs/85_PAGE90-91_.050_MALE_HDR_ST_RA_SMT.pdf, Connector Type="Header, Unshrouded", Contact Finish=Gold, Contact Finish Thickness=Flash, Contact Mating Length="0.118\" (3.00mm)", Contact Type="Male Pin", Fastening Type=-, Features="Board Guide", Manufacturer Part Number=GRPB052VWQP-RC, Mounting Type="Surface Mount", Number of Positions=10, Number of Positions Loaded=All, Number of Rows=2, Packaging=Bulk, Pitch="0.050\" (1.27mm)", Pricing 1="1=1.3, 10=1.083, 25=1.0024, 50=0.9022, 100=0.802, 250=0.70176, 500=0.6416, 1000=0.58145, 2500=0.5213 (USD)", RoHS="RoHS Compliant", Row Spacing="0.050\" (1.27mm)", Stock 1=16500, Supplier 1=Digi-Key, Termination=Solder
Q1 Q2: library part FMMT591CT-ND, "Transistor PNP", Current - Collector (Ic) (Max)=1A, Current - Collector Cutoff (Max)=100nA, DC Current Gain (hFE) (Min) @ Ic, Vce="100 @ 500mA, 5V", Frequency - Transition=150MHz, Manufacturer="Diodes Incorporated", Manufacturer Part Number=FMMT591TA, Operating Temperature="-55°C ~ 150°C (TJ)", Package / Case="TO-236-3, SC-59, SOT-23-3", Power - Max=500mW, Supplier Device Package=SOT-23-3, Voltage - Collector Emitter Breakdown (Max)=60V, Category="Discrete Semiconductor Products", ComponentLink1Description=http://www.diodes.com/_files/datasheets/FMMT591.pdf, ComponentLink1URL=http://www.diodes.com/_files/datasheets/FMMT591.pdf, Mounting Type="Surface Mount", Packaging="Cut Tape (CT)", Part Status=Active, Pricing 1="1=0.45, 10=0.363, 100=0.2472, 500=0.1854, 1000=0.13905 (USD)", RoHS="RoHS Compliant", Stock 1=2485, Supplier 1=Digi-Key, Supplier Part Number 1=FMMT591CT-ND, Transistor Type=PNP, Vce Saturation (Max) @ Ib, Ic="350mV @ 100mA, 1A"
R1 R2: library part R-0805(2012), "___ OHM ___ mW 0805(2012) SMD", Manufacturer=Yageo, Manufacturer Part Number=RC0805JR-0727RL, Operating Temperature="-55°C ~ 155°C", Package / Case="0805 (2012 Metric)", Power (Watts)="0.125W, 1/8W", Supplier Device Package=0805, Supplier Part Number 1=311-27ARCT-ND, Temperature Coefficient=±100ppm/°C, Tolerance=±5%, Category=Resistors, ComponentLink1Description=http://www.yageo.com/documents/recent/PYu-RC_Group_51_RoHS_L_7.pdf, ComponentLink1URL=http://www.yageo.com/documents/recent/PYu-RC_Group_51_RoHS_L_7.pdf, Composition="Thick Film", Failure Rate=-, Features="Moisture Resistant", Height - Seated (Max)="0.024\" (0.60mm)", Packaging="Cut Tape (CT)", Part Status=Active, Pricing 1="1=0.1, 10=0.016, 25=0.0116, 50=0.009, 100=0.0066, 250=0.00504, 500=0.00404, 1000=0.00297 (USD)", Resistance (Ohms)=27, RoHS="RoHS Compliant", Size / Dimension="0.079\" L x 0.049\" W (2.00mm x 1.25mm)", Stock 1=89837, Supplier 1=Digi-Key
R3 R4: library part R-0805(2012), "___ OHM ___ mW 0805(2012) SMD", Manufacturer=Yageo, Manufacturer Part Number=RC0805JR-0730RL, Operating Temperature="-55°C ~ 155°C", Package / Case="0805 (2012 Metric)", Power (Watts)="0.125W, 1/8W", Supplier Device Package=0805, Supplier Part Number 1=311-30ARCT-ND, Temperature Coefficient=±100ppm/°C, Tolerance=±5%, Category=Resistors, ComponentLink1Description=http://www.yageo.com/documents/recent/PYu-RC_Group_51_RoHS_L_7.pdf, ComponentLink1URL=http://www.yageo.com/documents/recent/PYu-RC_Group_51_RoHS_L_7.pdf, Composition="Thick Film", Failure Rate=-, Features="Moisture Resistant", Height - Seated (Max)="0.024\" (0.60mm)", Packaging="Cut Tape (CT)", Part Status=Active, Pricing 1="1=0.1, 10=0.016, 25=0.0116, 50=0.009, 100=0.0066, 250=0.00504, 500=0.00404, 1000=0.00297 (USD)", Resistance (Ohms)=30, RoHS="RoHS Compliant", Size / Dimension="0.079\" L x 0.049\" W (2.00mm x 1.25mm)", Stock 1=59788, Supplier 1=Digi-Key
R5 R6: library part R-0805(2012), "___ OHM ___ mW 0805(2012) SMD", Manufacturer=Yageo, Manufacturer Part Number=RC0805JR-071KL, Operating Temperature="-55°C ~ 155°C", Package / Case="0805 (2012 Metric)", Power (Watts)="0.125W, 1/8W", Supplier Device Package=0805, Supplier Part Number 1=311-1.0KARCT-ND, Temperature Coefficient=±100ppm/°C, Tolerance=±5%, Category=Resistors, ComponentLink1Description=http://www.yageo.com/documents/recent/PYu-RC_Group_51_RoHS_L_7.pdf, ComponentLink1URL=http://www.yageo.com/documents/recent/PYu-RC_Group_51_RoHS_L_7.pdf, Composition="Thick Film", Failure Rate=-, Features="Moisture Resistant", Height - Seated (Max)="0.024\" (0.60mm)", Packaging="Cut Tape (CT)", Part Status=Active, Pricing 1="1=0.1, 10=0.016, 25=0.0116, 50=0.009, 100=0.0066, 250=0.00504, 500=0.00404, 1000=0.00297 (USD)", Resistance (Ohms)=1k, RoHS="RoHS Compliant", Size / Dimension="0.079\" L x 0.049\" W (2.00mm x 1.25mm)", Stock 1=1174465, Supplier 1=Digi-Key
R9: library part R-0805(2012), "___ OHM ___ mW 0805(2012) SMD", Case/Package=0805, Case Code (Metric)=2012, Manufacturer="Panasonic ECG", Manufacturer Part Number=ERJ-6ENF9763V, Max Operating Temperature=155°C, Max Power Dissipation=125mW, Min Operating Temperature=-55°C, Package Quantity=1, Supplier Part Number 1=667-ERJ-6ENF9763V, Temperature Coefficient=100ppm/°C, Tolerance=1%, Voltage Rating=150V, Case Code (Imperial)=0805, ComponentLink1Description=https://datasheet.ciiva.com/16776/70260748-16776101.pdf, ComponentLink1URL=https://datasheet.ciiva.com/16776/70260748-16776101.pdf, ComponentLink2Description=https://datasheet.ciiva.com/9179/aoa0000ce2-9179366.pdf, ComponentLink2URL=https://datasheet.ciiva.com/9179/aoa0000ce2-9179366.pdf, ComponentLink3Description=https://datasheet.ciiva.com/16758/70260748-16758678.pdf, ComponentLink3URL=https://datasheet.ciiva.com/16758/70260748-16758678.pdf, ComponentLink4Description=https://datasheet.ciiva.com/46438/1678782-46438408.pdf, ComponentLink4URL=https://datasheet.ciiva.com/46438/1678782-46438408.pdf, ComponentLink5Description=https://datasheet.ciiva.com/22668/1678782-22668460.pdf, ComponentLink5URL=https://datasheet.ciiva.com/22668/1678782-22668460.pdf, Composition="Thick Film", Contact Plating=Tin, Depth=1.25mm, Height=0.6mm, Lead Free="Lead Free", Length=2mm, Mount="Surface Mount", Number of Terminations=2, Packaging="Tape and Reel", Power Rating=125mW, Pricing 1="1=0.1, 10=0.022, 50=0.022, 100=0.009, 1000=0.007, 10000=0.004 (USD)", REACH SVHC=Yes, Resistance=976KR, Stock 1=48708, Supplier 1=Mouser, Termination=SMD/SMT, Voltage Rating (DC)=150V, Width=0.049inch
R10: library part R-0805(2012), "___ OHM ___ mW 0805(2012) SMD", Case/Package=0805, Case Code (Metric)=2012, Manufacturer=Vishay, Manufacturer Part Number=CRCW0805562KFKEA, Max Operating Temperature=155°C, Max Power Dissipation=125mW, Min Operating Temperature=-55°C, Package Quantity=10, Supplier Part Number 1=71-CRCW0805-562K-E3, Temperature Coefficient=100ppm/°C, Tolerance=1%, Voltage Rating=150V, Case Code (Imperial)=0805, ComponentLink1Description=https://datasheet.ciiva.com/22706/1697337-22706277.pdf, ComponentLink1URL=https://datasheet.ciiva.com/22706/1697337-22706277.pdf, ComponentLink2Description=https://datasheet.ciiva.com/2525/dcrcwe3-2525767.pdf, ComponentLink2URL=https://datasheet.ciiva.com/2525/dcrcwe3-2525767.pdf, ComponentLink3Description=https://datasheet.ciiva.com/2525/dcrcwe3-2525768.pdf, ComponentLink3URL=https://datasheet.ciiva.com/2525/dcrcwe3-2525768.pdf, ComponentLink4Description=https://datasheet.ciiva.com/2525/dcrcwe3-2525769.pdf, ComponentLink4URL=https://datasheet.ciiva.com/2525/dcrcwe3-2525769.pdf, ComponentLink5Description=https://datasheet.ciiva.com/8928/dcrcwe3-8928345.pdf, ComponentLink5URL=https://datasheet.ciiva.com/8928/dcrcwe3-8928345.pdf, ComponentLink6Description=https://datasheet.ciiva.com/17160/dcrcwe3-17160041.pdf, ComponentLink6URL=https://datasheet.ciiva.com/17160/dcrcwe3-17160041.pdf, ComponentLink7Description=https://datasheet.ciiva.com/22674/1847332-22674793.pdf, ComponentLink7URL=https://datasheet.ciiva.com/22674/1847332-22674793.pdf, ComponentLink8Description=https://datasheet.ciiva.com/7670/1697337-7670907.pdf, ComponentLink8URL=https://datasheet.ciiva.com/7670/1697337-7670907.pdf, ComponentLink9Description=https://datasheet.ciiva.com/7670/1697337-7670908.pdf, ComponentLink9URL=https://datasheet.ciiva.com/7670/1697337-7670908.pdf, ComponentLink10Description=https://datasheet.ciiva.com/16204/dcrcwe3-16204271.pdf, ComponentLink10URL=https://datasheet.ciiva.com/16204/dcrcwe3-16204271.pdf, Composition="Thick Film", Contact Plating=Tin, Depth=1.25mm, Height=0.02inch, Length=2mm, Military Standard=Not, Number of Pins=2, Number of Terminations=2, Packaging="Tape and Reel", Power Rating=125mW, Pricing 1="1=0.1, 10=0.049, 50=0.049, 100=0.028, 1000=0.019, 10000=0.007 (USD)", Radiation Hardening=No, REACH SVHC=Unknown, Resistance=562KR, Stock 1=9712, Supplier 1=Mouser, Weight=0.000194oz, Width=1.25mm
R12 R13 R14 R15 R16 R17 R18 R19: library part R-0805(2012), "___ OHM ___ mW 0805(2012) SMD"
  R13 R15: Resistance=560k
T1: library part CRYSTAL_8MHz, "Oscillator Crystal 8MHz 10ppm", ESR (Equivalent Series Resistance)="72 Ohm", Frequency Stability=±20ppm, Load Capacitance=18pF, Manufacturer="Abracon LLC", Manufacturer Part Number=ABMM2-8.000MHZ-E2-T, Operating Mode=Fundamental, Operating Temperature="-20°C ~ 70°C", Package / Case="4-SMD, No Lead", Ratings=-, Supplier Part Number 1=535-9628-1-ND, Category="Crystals, Oscillators, Resonators", ComponentLink1Description=http://www.abracon.com/Resonators/ABMM2.pdf, ComponentLink1URL=http://www.abracon.com/Resonators/ABMM2.pdf, Frequency=8MHz, Frequency Tolerance=±20ppm, Height - Seated (Max)="0.047\" (1.20mm)", Mounting Type="Surface Mount", Packaging="Cut Tape (CT)", Part Status=Active, Pricing 1="1=0.82, 10=0.721, 50=0.674, 100=0.5957, 500=0.5643 (USD)", RoHS="RoHS Compliant", Size / Dimension="0.240\" L x 0.142\" W (6.00mm x 3.60mm)", Stock 1=56825, Supplier 1=Digi-Key, Type="MHz Crystal"
U1: "USB to Basic UART Interface Chip, UHCI/OHCI/EHCI Compatible, USB 2.0 Compatible, -40 to +85 degC, 16-Pin QFN, Pb-Free, Tape and Reel", Current - Supply=8mA, Manufacturer="FTDI, Future Technology Devices International Ltd", Operating Temperature="-40°C ~ 85°C", Package / Case="16-WQFN Exposed Pad", Supplier Device Package="16-QFN (4x4)", Supplier Part Number 1=768-1130-1-ND, Voltage - Supply="3.3 V ~ 5 V", Category="Integrated Circuits (ICs)", ComponentLink1Description=http://www.ftdichip.com/Support/Documents/DataSheets/ICs/DS_FT230X.pdf, ComponentLink1URL=http://www.ftdichip.com/Support/Documents/DataSheets/ICs/DS_FT230X.pdf, Function="Bridge, USB to UART", Interface=UART, Manufacturer Part Number=FT230XQ-R, Packaging="Cut Tape (CT)", Part Status=Active, Pricing 1="1=2.3, 25=1.97, 100=1.9, 250=1.71, 500=1.55, 1000=1.53001 (USD)", Protocol=USB, RoHS="RoHS Compliant", Standards="USB 2.0", Stock 1=40408, Supplier 1=Digi-Key
U2 U3: Manufacturer="Analog Devices Inc.", Manufacturer Part Number=AD7147PACPZ-500R7, Operating Temperature="-40°C ~ 85°C", Package / Case="24-WFQFN Exposed Pad, CSP", Supplier Device Package="24-LFCSP-WQ (4x4)", Supplier Part Number 1=AD7147PACPZ-500R7CT-ND, Voltage - Supply="2.6 V ~ 3.6 V", Voltage Supply Source="Single Supply", Category="Integrated Circuits (ICs)", ComponentLink1Description=http://www.analog.com/media/en/technical-documentation/data-sheets/AD7147.pdf, ComponentLink1URL=http://www.analog.com/media/en/technical-documentation/data-sheets/AD7147.pdf, Data Interface=SPI, Mounting Type="Surface Mount", Packaging="Cut Tape (CT)", Part Status=Active, Pricing 1="1=3.6, 10=3.236, 100=2.6512 (USD)", Resolution (Bits)="16 b", RoHS="RoHS Compliant", Sampling Rate (Per Second)=250k, Stock 1=559, Supplier 1=Digi-Key, Type="Capacitance-to-Digital Converter"
U5: Current - Limit (Min)=-, Current - Output=100mA, Manufacturer=STMicroelectronics, Operating Temperature="0°C ~ 125°C", Package / Case=TO-243AA, Supplier Device Package=SOT-89-3, Supplier Part Number 1=497-1200-1-ND, Voltage - Dropout (Typical)="1.7V @ 40mA", Voltage - Input="Up to 30V", Voltage - Output=3.3V, Category="Integrated Circuits (ICs)", ComponentLink1Description=http://www.st.com/content/ccc/resource/technical/document/datasheet/15/55/e5/aa/23/5b/43/fd/CD00000446.pdf/files/CD00000446.pdf/jcr:content/translations/en.CD00000446.pdf, ComponentLink1URL=http://www.st.com/content/ccc/resource/technical/document/datasheet/15/55/e5/aa/23/5b/43/fd/CD00000446.pdf/files/CD00000446.pdf/jcr:content/translations/en.CD00000446.pdf, Manufacturer Part Number=L78L33ACUTR, Mounting Type="Surface Mount", Packaging="Cut Tape (CT)", Part Status=Active, Pricing 1="1=0.43, 10=0.349, 100=0.2373, 500=0.17798, 1000=0.13349 (USD)", Regulator Topology="Positive Fixed", RoHS="RoHS Compliant", Stock 1=46216, Supplier 1=Digi-Key
U7: "3D accelerometer and 3D gyroscope", Manufacturer=STMicroelectronics, Manufacturer Part Number=LSM6DS3HTR, Operating Temperature="-40°C ~ 85°C (TA)", Supplier Part Number 1=497-16367-1-ND, Category="Sensors, Transducers", ComponentLink1Description=http://www.st.com/content/ccc/resource/technical/document/datasheet/group0/38/96/79/af/ab/62/42/c3/DM00229854/files/DM00229854.pdf/jcr:content/translations/en.DM00229854.pdf, ComponentLink1URL=http://www.st.com/content/ccc/resource/technical/document/datasheet/group0/38/96/79/af/ab/62/42/c3/DM00229854/files/DM00229854.pdf/jcr:content/translations/en.DM00229854.pdf, Output Type="I²C, SPI", Part Status=Active, Pricing 1="1=3.98, 10=3.572, 100=2.9264 (USD)", RoHS="RoHS Compliant", Sensor Type="Accelerometer, Gyroscope, Temperature, 6 Axis", Stock 1=34853, Supplier 1=Digi-Key
U8: library part CMP-0139-00285-1, "Start-up Synchronous Boost Regulator with True Output Disconnect or Input / Output Bypass Option, 350 mA, Input Voltage 0.65 to 5.5 V, Output Voltage 2.0 to 5.5 V, -40 to 85 degC, 6-pin SOT-23 (CHY6), Tape and Reel", Case/Package=SOT-23, Frequency=500KHz, Manufacturer=Microchip, Max Input Voltage=5.5V, Max Operating Temperature=85°C, Max Output Current=350mA, Min Input Voltage=650mV, Min Operating Temperature=-40°C, Min Output Voltage=2V, Package Quantity=3000, Supplier Part Number 1=579-MCP1640BT-I/CHY, ComponentLink1Description=https://datasheet.ciiva.com/17368/22234b-17368709.pdf, ComponentLink1URL=https://datasheet.ciiva.com/17368/22234b-17368709.pdf, ComponentLink2Description=https://datasheet.ciiva.com/7994/1669480-7994598.pdf, ComponentLink2URL=https://datasheet.ciiva.com/7994/1669480-7994598.pdf, ComponentLink3Description=https://datasheet.ciiva.com/14150/mcp1640-eng-datasheet-14150779.pdf, ComponentLink3URL=https://datasheet.ciiva.com/14150/mcp1640-eng-datasheet-14150779.pdf, ComponentLink4Description=https://datasheet.ciiva.com/22711/1669480-22711102.pdf, ComponentLink4URL=https://datasheet.ciiva.com/22711/1669480-22711102.pdf, ComponentLink5Description=https://datasheet.ciiva.com/29305/651405-da-01-en-ic-reg-mcp1640bt-i-chy-sot-23-6-mcp-29305435.pdf, ComponentLink5URL=https://datasheet.ciiva.com/29305/651405-da-01-en-ic-reg-mcp1640bt-i-chy-sot-23-6-mcp-29305435.pdf, Contact Plating=Tin, Efficiency=96%, Height=1.3mm, Lead Free="Lead Free", Length=3.1mm, Manufacturer Part Number=MCP1640BT-I/CHY, Max Output Voltage=5.5V, Max Supply Voltage=5.5V, Min Supply Voltage=650mV, Number of Outputs=1, Number of Pins=6, Output Current=350mA, Output Voltage=5.5V, Packaging="Tape and Reel", Pricing 1="1=0.62, 10=0.57, 50=0.48, 100=0.44, 1000=0.44, 10000=0.44 (USD)", Radiation Hardening=No, REACH SVHC="No SVHC", Stock 1=12237, Supplier 1=Mouser, Switching Frequency=500KHz, Width=1.8mm
U9: library part CMP-0321-00383-2, "NiCd / NiMH Charge Controller with dT / dt Termination, 4 V, 0 to 70 degC, 8-pin SOIC (D), Green (RoHS & no Sb/Br)", Case/Package=SOIC, Manufacturer="Texas Instruments", Max Operating Temperature=70°C, Max Supply Voltage=6V, Min Input Voltage=4V, Min Operating Temperature=0°C, Operating Supply Current=500uA, Output Current=2A, Over Voltage Protection=N, Package Quantity=75, Supplier Part Number 1=595-BQ2002DSN, Supply Voltage=5V, Code_JEDEC=MS-012AA, ComponentLink1Description=Datasheet, ComponentLink1URL=http://www.ti.com/general/docs/lit/getliterature.tsp?genericPartNumber=BQ2002D&fileType=pdf, ComponentLink2Description=https://datasheet.ciiva.com/15114/getdatasheetpartid-517178-15114929.pdf, ComponentLink2URL=https://datasheet.ciiva.com/15114/getdatasheetpartid-517178-15114929.pdf, ComponentLink3Description=https://datasheet.ciiva.com/3213/bq2002t-3213543.pdf, ComponentLink3URL=https://datasheet.ciiva.com/3213/bq2002t-3213543.pdf, ComponentLink4Description=https://datasheet.ciiva.com/1933/bq2002d-1933224.pdf, ComponentLink4URL=https://datasheet.ciiva.com/1933/bq2002d-1933224.pdf, Contact Plating=Gold, DatasheetVersion=SLUS133, Eco-Plan="Green (RoHS & no Sb/Br)", Height=1.58mm, Lead Acid=N, Lead Free="Lead Free", Length=4.9mm, Li-Ion=N, Li-Polymer=N, Manufacturer Part Number=BQ2002DSN, Min Supply Voltage=4V, Mounting Technology="Surface Mount", NiCd=Y, NiMH=Y, Number of Pins=8, PackageDescription="8-Pin Plastic Small Outline Integrated Circuit, 4.9 x 3.9 mm, Pitch 1.27 mm Pitch", PackageReference=D0008A, PackageVersion="revM, Jun-2011", Packaging=Rail/Tube, PartNumber=BQ2002DSN, Pricing 1="1=2.81, 10=2.52, 50=2.4, 100=2.03, 1000=1.19, 10000=1.19 (USD)", Radiation Hardening=No, Stock 1=290, SubFamily="Battery Charge Management", Supplier 1=Mouser, Vin(Min)(V)=4, Weight=0.002561oz, Width=3.91mm
U10: library part CMP-2000-05093-1, "RF Transceiver Module, 128 kB Flash, -40 to 85 degC, 21-Pin Module, RoHS", Current - Receiving=16.4mA, Current - Transmitting=15.6mA, Frequency=2.4GHz, Manufacturer=CypressSemiconductorCorp, Operating Temperature=-40degC~85degC, Package / Case=Module, Power - Output=3dBm, Voltage - Supply=1.8V~4.5V, Antenna Type=Integrated,Chip, Category=RF/IFandRFID, Data Rate=1Mbps, Datasheet URL=http://www.cypress.com/file/140791/download, Datasheet Version="Rev. *E, 02/2016", Family=RFTransceiverModules, Manufacturer URL=http://www.cypress.com/, Memory Size=128kBFlash,16kBSRAM, Modulation=-, Mounting Type=SurfaceMount, Packaging=Tape&amp;Reel(TR), Protocol=Bluetoothv4.1, RF Family/Standard=Bluetooth, Sensitivity=-91dBm, Serial Interfaces=I²C,SPI,UART, Series=EZ-BLE™PRoC™

## Nets (pads, with @x,y where several pads share a name; then routed paths per layer and width w, separated by ;. In a path a pad name is that pad's centre, name@x,y a point inside that pad or via, vN(x,y) a via of type N, cw(c..) or ccw(c..) an arc to the next point about the centre after c; other vN are vias at no path point)
3.3V: C1.1 C4.1 C6.1 C11.2 C12.2 D1.A D2.A J28.2 J30.2 U1.1 U1.8 U1.10 U2.11 U2.12 U3.11 U3.12 U5.1 U7.2 U7.3 U7.5 U7.8
3.3V_BAT: C16.1 R9.1 U8.5
A_INT1: U7.4
A_INT2: U7.9
B_V: B1.2 B2.2 C17.1 H1.2 R14.1 U8.3 U8.6
CLK_IN: C7.1 T1.1
CLK_OUT: C8.1 T1.3
CS1: U2.16
CS2: U3.16
CS3: U7.12
GND: B1.1 B2.1 C1.2 C2.2 C3.2 C4.2 C5.2 C6.2 C7.2 C8.2 C9.1 C10.1 C11.1 C12.1 C16.2 J1.5 J26.1 J28.3 J30.1 Q1.2 Q2.2 R10.2 R12.2 R13.1 R16.2 R17.2 T1.2 U1.3 U1.13 U1.17 U2.10 U2.25 U3.10 U3.25 U5.2 U7.6 U7.7 U8.2 U9.4 U9.7
ICSPCLK: J28.5
ICSPDAT: J28.4
INT_1: U2.17
INT_2: U3.17
MCLR: J28.1
MISO: U2.13 U3.13 U7.1
MOSI: U2.14 U3.14 U7.14
NetC3_1: C3.1 U2.9
NetC5_1: C5.1 U3.9
NetC9_2: C9.2 R2.2 U1.6
NetC10_2: C10.2 R1.2 U1.7
NetC17_2: C17.2 H1.1 U8.1
NetD1_K: D1.K R3.2
NetD2_K: D2.K R4.2
NetD3_A: D3.A R18.2
NetD3_K: D3.K U9.2
NetJ1_2: J1.2 R2.1
NetJ1_3: J1.3 R1.1
NetQ1_1: Q1.1 R5.1
NetQ1_3: Q1.3 R3.1
NetQ2_1: Q2.1 R6.2
NetQ2_3: Q2.3 R4.1
NetR5_2: R5.2 U2.18
NetR6_1: R6.1 U3.18
NetR9_2: R9.2 R10.1 U8.4
NetR13_2: R13.2 R15.1 U9.1
NetR14_2: R14.2 R17.1 U9.3
P2_1: J30.4
P2_2: J30.3
RESET: J30.7
RX: U1.15
S1: J2.1 U2.19
S2: J3.1 U2.20
S3: J4.1 U2.21
S4: J5.1 U2.22
S5: J6.1 U2.23
S6: J7.1 U2.24
S7: J8.1 U2.1
S8: J9.1 U2.2
S9: J10.1 U2.3
S10: J11.1 U2.4
S11: J12.1 U2.5
S12: J13.1 U2.6
S13: J14.1 U3.19
S14: J15.1 U3.20
S15: J16.1 U3.21
S16: J17.1 U3.22
S17: J18.1 U3.23
S18: J19.1 U3.24
S19: J20.1 U3.1
S20: J21.1 U3.2
S21: J22.1 U3.3
S22: J23.1 U3.4
S23: J24.1 U3.5
S24: J25.1 U3.6
SCLK: U2.15 U3.15 U7.13
TS: R12.1 R16.1 R19.2 U9.5
TX: U1.2
V_USB: C2.1 J1.1 R15.2 R18.1 R19.1 U5.3 U9.6
pads on no net: D1.0 D2.0 D3.0 J1.4 J1.15 J1.16 J1.18 J28.6 J30.5 J30.6 J30.8 J30.9 J30.10 J30.21 J30.22 Q1.0 Q2.0 U1.4 U1.5 U1.9 U1.11 U1.12 U1.14 U1.16 U2.7 U2.8 U3.7 U3.8 U5.0 U7.10 U7.11 U9.8 U10.1 U10.2 U10.3 U10.4 U10.5 U10.6 U10.7 U10.8 U10.9 U10.10 U10.11 U10.12 U10.13 U10.14 U10.15 U10.16 U10.17 U10.18 U10.19 U10.20 U10.21

## Keep-outs
Keep-Out Layer:
  the board outline again, w10

## Other copper
Top Layer:
  pour cut-out: 0,1125 650,1125 650,790 0,790
Ground:
  pour cut-out: 0,1125 650,1125 650,790 0,790

## Silkscreen, mask and mechanical layers (free items; w line width, h text height)
Mechanical 3:
  the board outline again, w10

## Text inside footprints (layer, text, board x,y; h text height)
J30: Top Overlay "2" at 295,403.5 h39.37 r270; Top Overlay "1" at 295,528.5 h39.37 r270